# Altium PCB Sampler_DIOT.PCBDOC (part 2 of 10)
Units mm, origin at the board's own origin, x right, y up, seen from the top; angles counter-clockwise.
Board outline 222.9 x 100 mm, 4 copper layers (L1, P2, L3, L4), stack 1.6 mm thick; 697 components, 418 nets, 2175 pads, 1124 vias.
Unrouted connection lines stored in the file: 6.
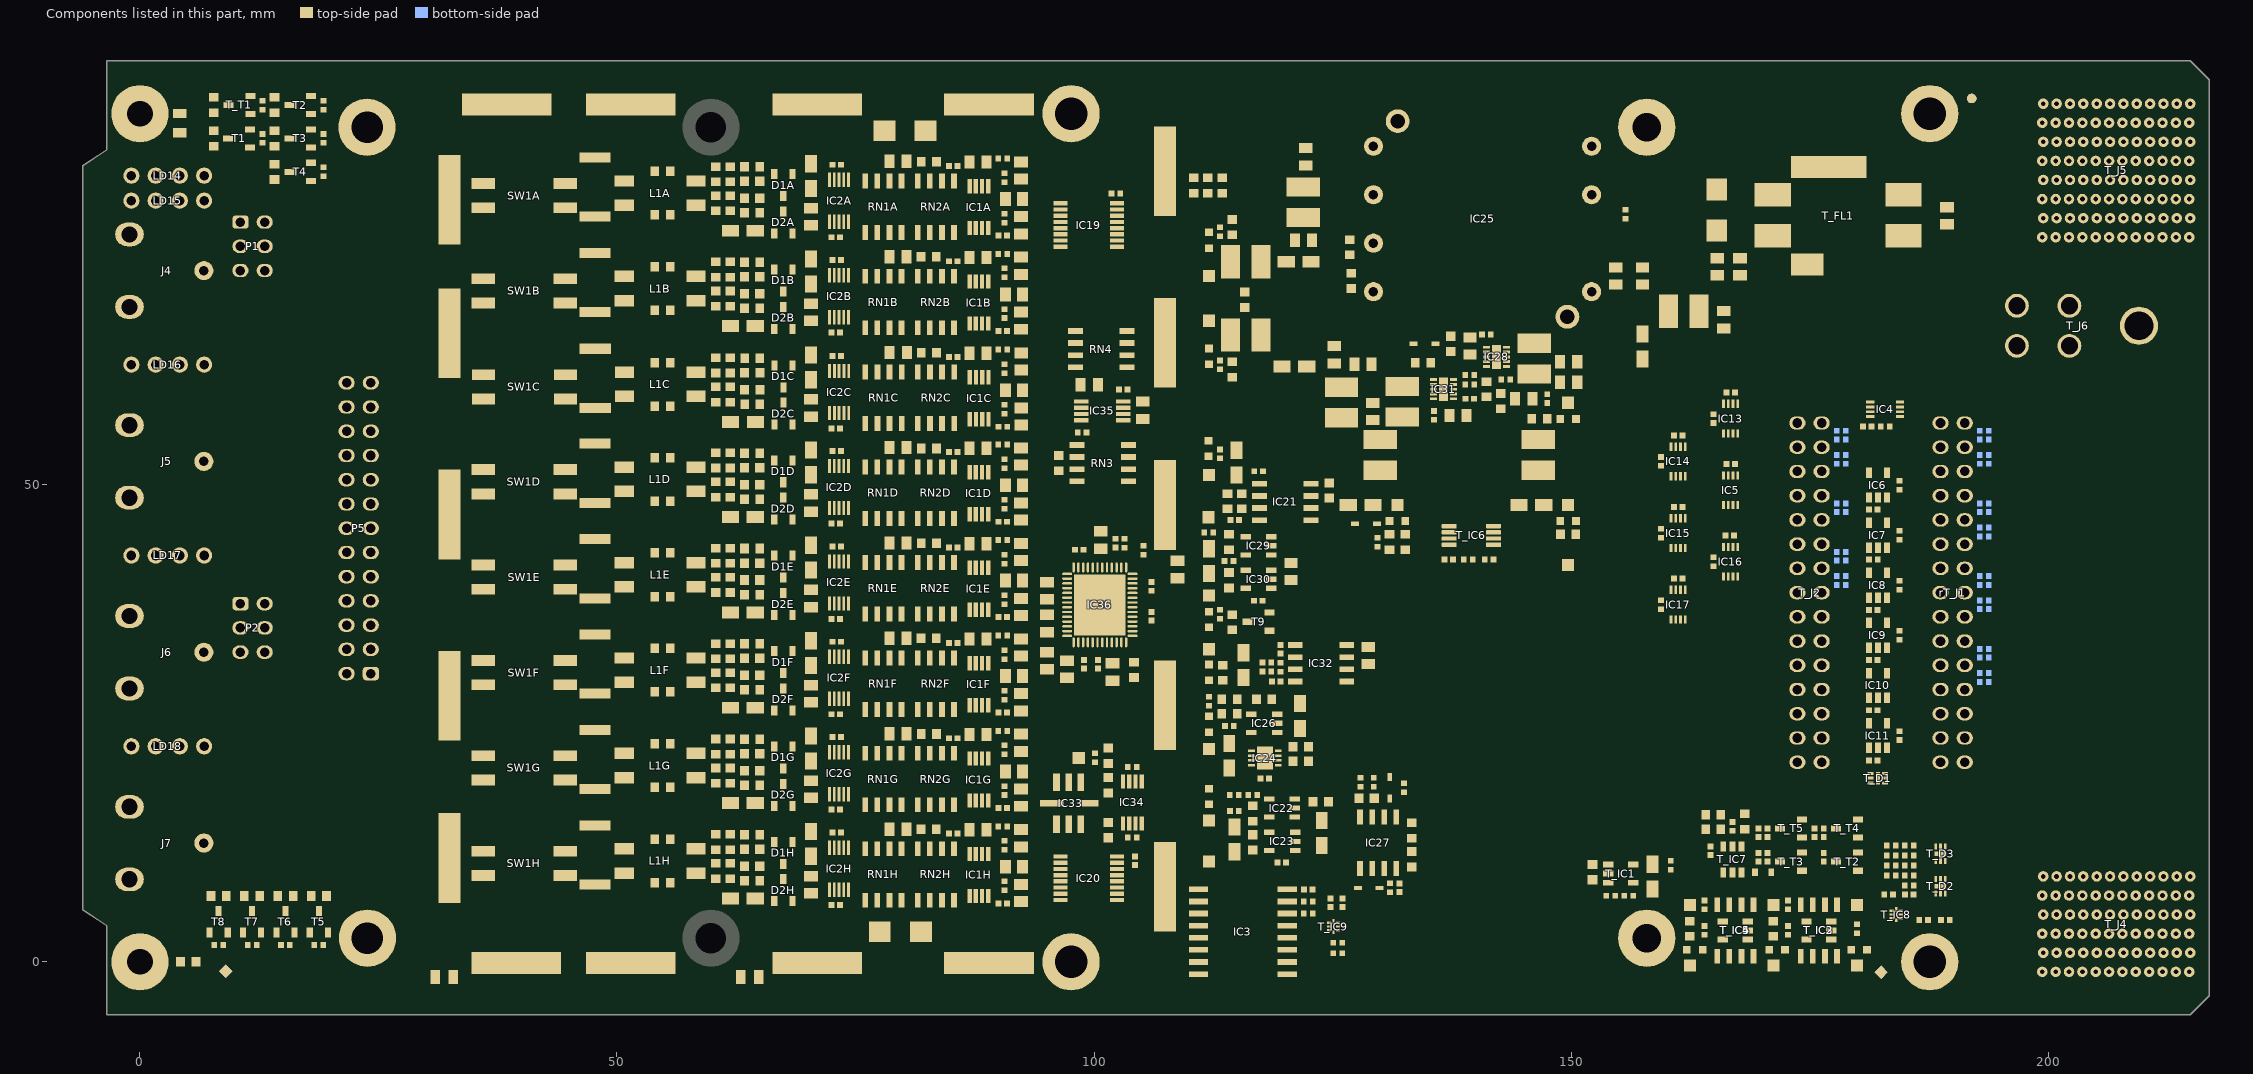
[diagram p4: the components of this part, seen from the top]

## Components (designator, comment, footprint, x,y, rotation, side; value= is the part's Value field where it differs from the comment) (continued)
R5F "49R9" RESC6331X70N 47.694,31.205 r90 top (schematic designator R5)
R5G "49R9" RESC6331X70N 47.694,21.205 r90 top (schematic designator R5)
R5H "49R9" RESC6331X70N 47.694,11.205 r90 top (schematic designator R5)
R6A "51" RESC1005X40N 90.603,77.956 r90 top (schematic designator R6)
R6B "51" RESC1005X40N 90.603,67.956 r90 top (schematic designator R6)
R6C "51" RESC1005X40N 90.616,57.912 r90 top (schematic designator R6)
R6D "51" RESC1005X40N 90.603,47.956 r90 top (schematic designator R6)
R6E "51" RESC1005X40N 90.603,37.956 r90 top (schematic designator R6)
R6F "51" RESC1005X40N 90.603,27.956 r90 top (schematic designator R6)
R6G "51" RESC1005X40N 90.603,17.956 r90 top (schematic designator R6)
R6H "51" RESC1005X40N 90.603,7.956 r90 top (schematic designator R6)
R7A "24k" RESC1608X55N 82.694,83.88 r180 top (schematic designator R7)
R7B "24k" RESC1608X55N 82.669,73.905 r180 top (schematic designator R7)
R7C "24k" RESC1608X55N 82.694,63.855 r180 top (schematic designator R7)
R7D "24k" RESC1608X55N 82.694,53.805 r180 top (schematic designator R7)
R7E "24k" RESC1608X55N 82.694,43.88 r180 top (schematic designator R7)
R7F "24k" RESC1608X55N 82.669,33.905 r180 top (schematic designator R7)
R7G "24k" RESC1608X55N 82.694,23.88 r180 top (schematic designator R7)
R7H "24k" RESC1608X55N 82.669,13.88 r180 top (schematic designator R7)
R8A "Undefined" RESC1608X55N 54.764,78.288 r0 top (schematic designator R8)
R8B "Undefined" RESC1608X55N 54.764,68.288 r0 top (schematic designator R8)
R8C "Undefined" RESC1608X55N 54.777,58.244 r0 top (schematic designator R8)
R8D "Undefined" RESC1608X55N 54.764,48.288 r0 top (schematic designator R8)
R8E "Undefined" RESC1608X55N 54.764,38.288 r0 top (schematic designator R8)
R8F "Undefined" RESC1608X55N 54.764,28.288 r0 top (schematic designator R8)
R8G "Undefined" RESC1608X55N 54.764,18.288 r0 top (schematic designator R8)
R8H "Undefined" RESC1608X55N 54.764,8.288 r0 top (schematic designator R8)
R9A "0" RESC1608X55N 60.352,79.512 r270 top (schematic designator R9)
R9B "0" RESC1608X55N 60.352,69.512 r270 top (schematic designator R9)
R9C "0" RESC1608X55N 60.365,59.468 r270 top (schematic designator R9)
R9D "0" RESC1608X55N 60.352,49.512 r270 top (schematic designator R9)
R9E "0" RESC1608X55N 60.352,39.512 r270 top (schematic designator R9)
R9F "0" RESC1608X55N 60.352,29.512 r270 top (schematic designator R9)
R9G "0" RESC1608X55N 60.352,19.512 r270 top (schematic designator R9)
R9H "0" RESC1608X55N 60.352,9.512 r270 top (schematic designator R9)
R10A "1k8" RESC1608X55N 64.162,78.496 r0 top (schematic designator R10)
R10B "1k8" RESC1608X55N 64.162,68.496 r0 top (schematic designator R10)
R10C "1k8" RESC1608X55N 64.175,58.452 r0 top (schematic designator R10)
R10D "1k8" RESC1608X55N 64.162,48.496 r0 top (schematic designator R10)
R10E "1k8" RESC1608X55N 64.162,38.496 r0 top (schematic designator R10)
R10F "1k8" RESC1608X55N 64.162,28.496 r0 top (schematic designator R10)
R10G "1k8" RESC1608X55N 64.162,18.496 r0 top (schematic designator R10)
R10H "1k8" RESC1608X55N 64.162,8.496 r0 top (schematic designator R10)
R11A "100k" RESC1608X55N 61.876,79.512 r270 top (schematic designator R11)
R11B "100k" RESC1608X55N 61.876,69.512 r270 top (schematic designator R11)
R11C "100k" RESC1608X55N 61.889,59.468 r270 top (schematic designator R11)
R11D "100k" RESC1608X55N 61.876,49.512 r270 top (schematic designator R11)
R11E "100k" RESC1608X55N 61.876,39.512 r270 top (schematic designator R11)
R11F "100k" RESC1608X55N 61.876,29.512 r270 top (schematic designator R11)
R11G "100k" RESC1608X55N 61.876,19.512 r270 top (schematic designator R11)
R11H "100k" RESC1608X55N 61.876,9.512 r270 top (schematic designator R11)
R12A "51" RESC1005X40N 90.603,82.206 r270 top (schematic designator R12)
R12B "51" RESC1005X40N 90.603,72.206 r270 top (schematic designator R12)
R12C "51" RESC1005X40N 90.616,62.162 r270 top (schematic designator R12)
R12D "51" RESC1005X40N 90.603,52.206 r270 top (schematic designator R12)
R12E "51" RESC1005X40N 90.603,42.206 r270 top (schematic designator R12)
R12F "51" RESC1005X40N 90.603,32.206 r270 top (schematic designator R12)
R12G "51" RESC1005X40N 90.603,22.206 r270 top (schematic designator R12)
R12H "51" RESC1005X40N 90.603,12.206 r270 top (schematic designator R12)
R13A "2k4" RESC1005X40N 90.444,84.205 r180 top (schematic designator R13)
R13B "2k4" RESC1005X40N 90.444,74.205 r180 top (schematic designator R13)
R13C "2k4" RESC1005X40N 90.457,64.161 r180 top (schematic designator R13)
R13D "2k4" RESC1005X40N 90.444,54.205 r180 top (schematic designator R13)
R13E "2k4" RESC1005X40N 90.444,44.205 r180 top (schematic designator R13)
R13F "2k4" RESC1005X40N 90.444,34.205 r180 top (schematic designator R13)
R13G "2k4" RESC1005X40N 90.444,24.205 r180 top (schematic designator R13)
R13H "2k4" RESC1005X40N 90.444,14.205 r180 top (schematic designator R13)
R14 "100" RESC1005X40N 182.917,56.114 r180 top
R15 "100" RESC1005X40N 184.427,49.97 r270 top
R16 "100" RESC1005X40N 184.427,44.72 r270 top
R17 "100" RESC1005X40N 184.427,39.47 r270 top
R18 "100" RESC1005X40N 184.427,34.22 r270 top
R19 "100" RESC1005X40N 184.427,23.72 r270 top
R20 "100" RESC1005X40N 164.938,56.948 r90 top
R21 "100" RESC1005X40N 159.427,52.444 r90 top
R22 "100" RESC1005X40N 159.427,44.944 r90 top
R23 "100" RESC1005X40N 164.927,41.945 r90 top
R24 "100" RESC1005X40N 159.427,37.445 r90 top
R25 "10k" RESC1005X40N 12.85,86.301 r270 top
R26 "1k2" RESC1608X55N 7.75,86.301 r90 top
R27 "10k" RESC1005X40N 19.214,89.802 r270 top
R28 "1k2" RESC1608X55N 14.1,89.802 r90 top
R29 "10k" RESC1005X40N 19.214,86.301 r270 top
R30 "1k2" RESC1608X55N 14.1,86.301 r90 top
R31 "10k" RESC1005X40N 19.214,82.8 r270 top
R32 "1k2" RESC1608X55N 14.1,82.8 r90 top
R33 "10k" RESC1005X40N 18.75,1.775 r180 top
R34 "1k2" RESC1608X55N 18.75,6.9 r0 top
R35 "10k" RESC1005X40N 118.13,30.424 r0 top
R36 "10k" RESC1005X40N 15.25,1.775 r180 top
R37 "1k2" RESC1608X55N 15.25,6.9 r0 top
R38 "1k2" RESC1608X55N 11.746,6.9 r0 top
R39 "10k" RESC1005X40N 11.746,1.775 r180 top
R40 "1k2" RESC1608X55N 8.243,6.9 r0 top
R41 "Undefined" RESC1608X55N 110.444,81.38 r270 top
R42 "Undefined" RESC1608X55N 113.444,81.38 r270 top
R43 "10k" RESC1005X40N 8.243,1.775 r180 top
R45 "10k" RESC1005X40N 113.221,76.54 r90 top
R46 "1k2" RESC1608X55N 114.5,77.01 r270 top
R47 "10k" RESC1005X40N 179.977,3.471 r90 top
R48 "10k" RESC1005X40N 113.2,53.23 r270 top
R49 "5k1" RESC1005X40N 114.7,17.5 r0 top
R50 "2k7" RESC1608X55N 132.625,44 r270 top
R51 "24k" RESC1608X55N 113.993,48.269 r270 top
R52 "2k7" RESC1608X55N 115.493,48.269 r90 top
R53 "2k7" RESC1608X55N 117.837,27.5 r0 top
R54 "24k" RESC1608X55N 116.644,15.55 r270 top
R55 "5k1" RESC1005X40N 116.644,17.5 r0 top
R56 "Undefined" RESC1608X55N 126.944,71.38 r270 top
R57 "0" RESC1005X40N 155.694,78.38 r90 top
R58 "36k" RESC1608X55N 126.813,74.899 r270 top
R59 "10k" RESC1005X40N 127.925,18.82 r90 top
R60 "2k4" RESC1005X40N 132.511,18.242 r90 top
R61 "24k" RESC1608X55N 114.2,26.025 r180 top
R62 "62k" RESC1005X40N 129.325,18.82 r270 top
R63 "2k7" RESC1608X55N 114.2,27.5 r0 top
R64 "24k" RESC1608X55N 134.491,62.795 r180 top
R65 "5k1" RESC1005X40N 131.036,7.742 r270 top
R66 "270k" RESC1608X55N 142.641,58.77 r270 top
R67 "24k" RESC1608X55N 133.325,13.767 r90 top
R68 "82k" RESC1608X55N 141.141,60.02 r90 top
R69 "5k1" RESC1005X40N 143.141,61.02 r180 top
R70 "36k" RESC1608X55N 114.15,44 r270 top
R71 "33k" RESC1005X40N 112.05,45 r0 top
R72 "33k" RESC1005X40N 139.391,60.52 r0 top
R73 "62k" RESC1005X40N 118.13,31.364 r180 top
R74 "5k1" RESC1005X40N 139.391,61.52 r180 top
R75 "10k" RESC1005X40N 119.546,30.894 r90 top
R76 "1k" RESC1608X55N 114.5,35.6 r270 top
R77 "82k" RESC1608X55N 104.194,30.605 r90 top
R78 "0" RESC1005X40N 103.187,43.891 r90 top
R79 "100" RESC1005X40N 105.194,43.13 r270 top
R80 "0" RESC1005X40N 104.021,13.013 r180 top
R81 "0" RESC1005X40N 100.1,21.4 r90 top
R82 "0" RESC1005X40N 104.021,20.409 r180 top
R83 "24k" RESC1608X55N 96.3,52.275 r270 top
R84 "1k2" RESC1608X55N 130.975,44 r90 top
R85 "2k7" RESC1608X55N 113.5,30.3 r90 top
R86 "Undefined" RESC1608X55N 111.944,81.38 r270 top
R87 "1k2" RESC1608X55N 146.7,56.9 r180 top
R88 "1k2" RESC1608X55N 149.7,44.8 r180 top
R89 "1k2" RESC1608X55N 171.221,3.471 r90 top
R90 "1k2" RESC1608X55N 162.465,3.471 r90 top
R91 "470" RESC1005X40N 113.2,36.42 r270 top
R92 "10k" RESC1005X40N 112.05,27.3 r90 top
R93 "10k" RESC1005X40N 113.221,62.56 r270 top
R94 "1k2" RESC1608X55N 114.5,62.09 r90 top
R157 "0" RESC1005X40N 129.7,43.97 r270 top
RN1A "10k 5K 5K 10K" SOIC127P600X175-8N 77.923,79.157 r90 top (schematic designator RN1)
RN1B "10k 5K 5K 10K" SOIC127P600X175-8N 77.923,69.157 r90 top (schematic designator RN1)
RN1C "10k 5K 5K 10K" SOIC127P600X175-8N 77.936,59.113 r90 top (schematic designator RN1)
RN1D "10k 5K 5K 10K" SOIC127P600X175-8N 77.923,49.157 r90 top (schematic designator RN1)
RN1E "10k 5K 5K 10K" SOIC127P600X175-8N 77.923,39.157 r90 top (schematic designator RN1)
RN1F "10k 5K 5K 10K" SOIC127P600X175-8N 77.923,29.157 r90 top (schematic designator RN1)
RN1G "10k 5K 5K 10K" SOIC127P600X175-8N 77.923,19.157 r90 top (schematic designator RN1)
RN1H "10k 5K 5K 10K" SOIC127P600X175-8N 77.923,9.157 r90 top (schematic designator RN1)
RN2A "10k 5K 5K 10K" SOIC127P600X175-8N 83.429,79.155 r270 top (schematic designator RN2)
RN2B "10k 5K 5K 10K" SOIC127P600X175-8N 83.429,69.155 r270 top (schematic designator RN2)
RN2C "10k 5K 5K 10K" SOIC127P600X175-8N 83.442,59.112 r270 top (schematic designator RN2)
RN2D "10k 5K 5K 10K" SOIC127P600X175-8N 83.429,49.155 r270 top (schematic designator RN2)
RN2E "10k 5K 5K 10K" SOIC127P600X175-8N 83.429,39.155 r270 top (schematic designator RN2)
RN2F "10k 5K 5K 10K" SOIC127P600X175-8N 83.429,29.155 r270 top (schematic designator RN2)
RN2G "10k 5K 5K 10K" SOIC127P600X175-8N 83.429,19.155 r270 top (schematic designator RN2)
RN2H "10k 5K 5K 10K" SOIC127P600X175-8N 83.429,9.155 r270 top (schematic designator RN2)
RN3 "10k 5K 5K 10K" SOIC127P600X175-8N 100.925,52.275 r0 top
RN4 "10k 5K 5K 10K" SOIC127P600X175-8N 100.75,64.225 r0 top
rT_J1 "" 3M_N2530-6002RB 190,38.7 r270 top locked (schematic designator T_J1)
SCREW1 "M3x8" BOSSARD_BN5687-3061606_v 23.8,87.48 r0 top
SCREW2 "M3x8" BOSSARD_BN5687-3061606_v 23.844,2.48 r0 top
Standoff1 "M3x11" SAMTEC_SO-1115-03-N 23.844,2.48 r0 top
Standoff2 "M3x11" SAMTEC_SO-1115-03-N 23.8,87.48 r0 top
SW1A "Switch" SW_CTS_204-121ST 40.286,80.32 r0 top (schematic designator SW1)
SW1B "Switch" SW_CTS_204-121ST 40.286,70.32 r0 top (schematic designator SW1)
SW1C "Switch" SW_CTS_204-121ST 40.299,60.276 r0 top (schematic designator SW1)
SW1D "Switch" SW_CTS_204-121ST 40.286,50.32 r0 top (schematic designator SW1)
SW1E "Switch" SW_CTS_204-121ST 40.286,40.32 r0 top (schematic designator SW1)
SW1F "Switch" SW_CTS_204-121ST 40.286,30.32 r0 top (schematic designator SW1)
SW1G "Switch" SW_CTS_204-121ST 40.286,20.32 r0 top (schematic designator SW1)
SW1H "Switch" SW_CTS_204-121ST 40.286,10.32 r0 top (schematic designator SW1)
T1 "BSS138LT1G" SOT95P240X110-3N 10.4,86.301 r180 top
T2 "BSS138LT1G" SOT95P240X110-3N 16.8,89.802 r180 top
T3 "BSS138LT1G" SOT95P240X110-3N 16.8,86.301 r180 top
T4 "BSS138LT1G" SOT95P240X110-3N 16.8,82.8 r180 top
T5 "BSS138LT1G" SOT95P240X110-3N 18.75,4.2 r90 top
T6 "BSS138LT1G" SOT95P240X110-3N 15.25,4.2 r90 top
T7 "BSS138LT1G" SOT95P240X110-3N 11.746,4.2 r90 top
T8 "BSS138LT1G" SOT95P240X110-3N 8.243,4.2 r90 top
T9 "BSS138LT1G" SOT95P240X110-3N 117.25,35.65 r180 top
T_B7 "Plated Hole" c600h270 0,0 r0 top
T_B8 "Plated Hole" c600h270 0,88.9 r0 top locked
T_C1 "1uF" CAPC1608X87N 152.25,9.4 r90 top
T_C2 "4.7uF" CAPMP3216X180N 158.55,8.925 r270 top
T_C3 "100nF" CAPC1005X55N 172.753,3.284 r90 top
T_C4 "100nF" CAPC1005X55N 172.753,5.963 r270 top
T_C5 "100nF" CAPC1005X55N 163.997,3.284 r90 top
T_C6 "100nF" CAPC1005X55N 163.997,5.963 r270 top
T_C8 "100nF" CAPC1005X55N 137.188,42.184 r180 top
T_C9 "10uF" CAPC2012X95N 167.73,72.85 r90 top
T_C10 "10uF" CAPC2012X95N 165.33,72.85 r90 top
T_C11 "10uF" CAPC2012X95N 189.4,78.2 r270 top
T_C12 "18pF" CAPC1608X87N 5.05,0 r180 top
T_C13 "10nF" CAPC1005X55N 166.919,14.186 r90 top
T_C14 "100nF" CAPC1005X55N 175.542,13.527 r270 top
T_C15 "100nF" CAPC1005X55N 170.609,13.527 r270 top
T_C16 "10nF" CAPC1005X55N 169.658,13.527 r270 top
T_C17 "10nF" CAPC1005X55N 176.493,10.95 r90 top
T_C18 "10nF" CAPC1005X55N 169.658,10.95 r90 top
T_C19 "10nF" CAPC1005X55N 170.609,10.95 r90 top
T_C20 "100nF" CAPC1005X55N 164.62,11.636 r90 top
T_C21 "100nF" CAPC1005X55N 176.493,13.527 r90 top
T_C22 "100nF" CAPC1005X55N 183.28,7.042 r0 top
T_C23 "100nF" CAPC1005X55N 185.45,7.042 r180 top
T_C24 "100nF" CAPC1005X55N 126.05,6.196 r270 top
T_C25 "100nF" CAPC1005X55N 124.8,6.196 r270 top
T_D1 "UCLAMP3305P.TCT" SON50P160X65_HS-7N 182.177,19.25 r180 top
T_D2 "UCLAMP3305P.TCT" SON50P160X65_HS-7N 188.731,7.933 r90 top
T_D3 "UCLAMP3305P.TCT" SON50P160X65_HS-7N 188.731,11.332 r90 top
T_D5 "SMBJ12A" DIOM5336X265N 165.3,78.8 r90 top
T_D6 "CDBU0520-HF" SOD-523F 170.126,9.391 r180 top
T_FL1 "10A/50VDC" FIL_MURATA_BNX02 178,78.2 r180 top
T_IC1 "MIC5219-3.3YM5" SOT95P280X145-5N 155.225,9.25 r0 top
T_IC2 "24AA02E48T-I/OT" SOT95P280X145-5N 175.983,3.284 r180 top
T_IC3 "24AA025E48-I/SN" SOIC127P600X175-8N 175.983,3.284 r90 top
T_IC4 "24AA02E48T-I/OT" SOT95P280X145-5N 167.228,3.284 r180 top
T_IC5 "24AA025E48-I/SN" SOIC127P600X175-8N 167.228,3.284 r90 top
T_IC6 "LM75AIMMX/NOPB" DGK0008A_M 139.55,44.692 r180 top
T_IC7 "TPS3808G01DBVT" SOT95P280X145-6N 166.919,10.736 r90 top
T_IC8 "FXMA2102UMX" FXMA2102UMX 184.091,4.958 r270 top
T_IC9 "FXMA2102UMX" FXMA2102UMX 125.1,3.7 r270 top
T_J2 "" 3M_N2530-6002RB 175,38.7 r270 top locked
T_J4 "P1" AMPHENOL_10052825-101LF 207.15,3.95 r90 top locked
T_J5 "P6" AMPHENOL_10052838-101LF 207.15,82.95 r90 top locked
T_J6 "Mini-Fit Jr.™" MOLEX_39-30-0040 199.485,66.667 r270 top locked
T_M1 "PTH_3.4X6_BTKO" PTH-M3.4x6.0_BTKO 97.6,88.9 r180 top locked
T_M2 "PTH_3.4X6_BTKO" PTH-M3.4x6.0_BTKO 187.6,88.9 r180 top
T_M3 "PTH_3.4X6_BTKO" PTH-M3.4x6.0_BTKO 97.6,0 r0 top locked
T_M4 "PTH_3.4X6_BTKO" PTH-M3.4x6.0_BTKO 187.6,0 r0 top locked
T_R1 "1k8" RESC1608X55N 7.75,89.802 r90 top
T_R2 "0" RESC1005X40N 160.45,10.125 r270 top
T_R3 "10k" RESC1005X40N 12.85,89.802 r270 top
T_R4 "0" RESC1005X40N 156.05,6.925 r180 top
T_R5 "10k" RESC1005X40N 125.55,0.9 r0 top
T_R6 "10k" RESC1005X40N 125.55,2 r0 top
T_R7 "10k" RESC1005X40N 154.15,6.925 r0 top
T_R8 "10k" RESC1005X40N 141.405,42.184 r180 top
T_R9 "1k2" RESC1608X55N 164.907,15.4 r180 top
T_R13 "22" RESC1005X40N 185.472,9.044 r0 top
T_R14 "22" RESC1005X40N 185.472,10.098 r0 top
T_R15 "22" RESC1005X40N 185.472,7.99 r0 top
T_R16 "22" RESC1005X40N 185.472,11.153 r0 top
T_R17 "22" RESC1005X40N 189.25,4.4 r0 top
T_R18 "22" RESC1005X40N 185.472,12.207 r0 top
T_R19 "200" RESC1005X40N 186.95,4.4 r180 top
T_R25 "0" RESC1005X40N 139.22,42.184 r180 top
T_R26 "1M1" RESC2012X60N 4.152,87.9 r270 top
T_R27 "10M" RESC2113X55N 63.914,-1.604 r0 top
T_R28 "10M" RESC2113X55N 31.899,-1.604 r180 top
T_R29 "100k" RESC1608X55N 168.2,14.7 r90 top
T_R30 "2k7" RESC1608X55N 164.907,13.9 r0 top
T_R31 "10k" RESC1005X40N 183.562,9.034 r180 top
T_R32 "10k" RESC1005X40N 183.562,10.078 r180 top
T_R33 "10k" RESC1005X40N 183.562,11.153 r180 top
T_R34 "10k" RESC1005X40N 183.562,12.207 r180 top
T_R35 "0" RESC1005X40N 193.326,55.668 r180 bottom
T_R36 "0" RESC1005X40N 193.326,53.128 r180 bottom
T_R37 "0" RESC1005X40N 193.326,48.048 r180 bottom
T_R38 "0" RESC1005X40N 193.326,45.508 r180 bottom
T_R39 "0" RESC1005X40N 193.326,40.428 r180 bottom
T_R40 "0" RESC1005X40N 193.326,37.888 r180 bottom
T_R41 "0" RESC1005X40N 193.326,32.808 r180 bottom
T_R42 "0" RESC1005X40N 193.326,30.268 r180 bottom
T_R43 "0" RESC1005X40N 178.326,55.668 r180 bottom
T_R44 "0" RESC1005X40N 178.326,53.128 r180 bottom
T_R45 "0" RESC1005X40N 178.326,48.048 r180 bottom
T_R46 "0" RESC1005X40N 178.326,42.071 r180 bottom
T_R47 "0" RESC1005X40N 178.326,40.428 r180 bottom
T_R51 "0" RESC1005X40N 193.326,54.749 r180 bottom
T_R52 "0" RESC1005X40N 193.326,52.209 r180 bottom
T_R53 "0" RESC1005X40N 193.326,47.129 r180 bottom
T_R54 "0" RESC1005X40N 193.326,44.589 r180 bottom
T_R55 "0" RESC1005X40N 193.326,39.509 r180 bottom
T_R56 "0" RESC1005X40N 193.326,36.969 r180 bottom
T_R57 "0" RESC1005X40N 193.326,31.889 r180 bottom
T_R58 "0" RESC1005X40N 193.326,29.349 r180 bottom
T_R59 "0" RESC1005X40N 178.326,54.749 r180 bottom
T_R60 "0" RESC1005X40N 178.326,52.209 r180 bottom
T_R61 "0" RESC1005X40N 178.326,47.129 r180 bottom
T_R62 "0" RESC1005X40N 178.326,42.971 r180 bottom
T_R63 "0" RESC1005X40N 178.326,39.509 r180 bottom
T_R67 "10k" RESC1005X40N 122.45,6.331 r0 top
T_R68 "10k" RESC1005X40N 122.45,5.061 r0 top
T_T1 "BSS138LT1G" SOT95P240X110-3N 10.425,89.815 r180 top
T_T2 "BSS138LT1G" SOT95P240X110-3N 178.95,10.5 r180 top
T_T3 "BSS138LT1G" SOT95P240X110-3N 173.066,10.5 r180 top
T_T4 "BSS138LT1G" SOT95P240X110-3N 178.95,13.977 r180 top
T_T5 "BSS138LT1G" SOT95P240X110-3N 173.066,13.977 r180 top
TP1 "Test Point" TPS127 112.05,71.9 r270 top
TP2 "Test Point" TPS127 179.977,5.949 r90 top
TP3 "Test Point" TPS127 149.7,41.6 r90 top
TP4 "Test Point" TPS127 171.221,-0.387 r90 top
TP5 "Test Point" TPS127 179.977,-0.387 r90 top
TP6 "Test Point" TPS127 162.465,-0.387 r90 top
TP7 "Test Point" TPS127 112.05,51.025 r0 top
TP8 "Test Point" TPS127 112.05,14.798 r0 top
TP9 "Test Point" TPS127 112.05,22.29 r180 top
TP10 "Test Point" TPS127 112.05,38.406 r180 top
TP11 "Test Point" TPS127 149.7,47.88 r90 top
TP12 "Test Point" TPS127 131.8,47.88 r90 top
TP13 "Test Point" TPS127 112.05,32.763 r0 top
TP14 "Test Point" TPS127 112.05,10.5 r90 top
TP15 "Test Point" TPS127 98.4,21.35 r90 top
TP16 "Test Point" TPS127 112,46.6 r90 top
TP17 "Test Point" TPS127 149.7,58.597 r180 top
TP18 "Test Point" TPS127 171.221,5.949 r90 top
TP19 "Test Point" TPS127 162.465,5.949 r90 top
TP20 "Test Point" TPS127 112.05,67.2 r90 top
WASHER1 "D8xd3.2" BOSSARD_BN678-1250191_v 23.844,2.48 r180 bottom
WASHER2 "D8xd3.2" BOSSARD_BN678-1250191_v 23.844,2.48 r0 top
WASHER3 "D8xd3.2" BOSSARD_BN678-1250191_v 23.8,87.48 r180 bottom
WASHER4 "D8xd3.2" BOSSARD_BN678-1250191_v 23.8,87.48 r0 top

## Footprints (in the part's own frame and the unit in brackets; to place one, negate y for a bottom-side part, rotate by r counter-clockwise, add the part's x,y. Pads: shape width x height; smd on the part's side, far side on the other; paste and mask are expansions set on the pad)
3M_N2530-6002RB [mm] "30 Contacts - Straight .100\" x .100\" Low Profile Four-Wall Header"
  oval 1.4x1.7 hole 1: 1(-17.78,-1.27) 2(-17.78,1.27) 3(-15.24,-1.27) 4(-15.24,1.27) 5(-12.7,-1.27) 6(-12.7,1.27) 7(-10.16,-1.27) 8(-10.16,1.27) 9(-7.62,-1.27) 10(-7.62,1.27) 11(-5.08,-1.27) 12(-5.08,1.27) 13(-2.54,-1.27) 14(-2.54,1.27) 15(0,-1.27) 16(0,1.27) 17(2.54,-1.27) 18(2.54,1.27) 19(5.08,-1.27) 20(5.08,1.27) 21(7.62,-1.27) 22(7.62,1.27) 23(10.16,-1.27) 24(10.16,1.27) 25(12.7,-1.27) 26(12.7,1.27) 27(15.24,-1.27) 28(15.24,1.27) 29(17.78,-1.27) 30(17.78,1.27)
  silkscreen extent -22.71,-4.85 22.71,4.52, body extent -22.71,-4.11 22.71,4.52, height 9.91
61300621121 [mm]
  rrect50% 1.4x1.7 hole 1: 1(-2.54,-1.27)
  oval 1.4x1.7 hole 1: 2(-2.54,1.27) 3(0,-1.27) 4(0,1.27) 5(2.54,-1.27) 6(2.54,1.27)
  silkscreen extent -4.54,-2.62 3.96,2.62, body extent -3.81,-2.54 3.81,2.54, height 8.59
61302621121 [mm]
  rrect50% 1.4x1.7 hole 1: 1(-15.24,-1.27)
  oval 1.4x1.7 hole 1: 2(-15.24,1.27) 3(-12.7,-1.27) 4(-12.7,1.27) 5(-10.16,-1.27) 6(-10.16,1.27) 7(-7.62,-1.27) 8(-7.62,1.27) 9(-5.08,-1.27) 10(-5.08,1.27) 11(-2.54,-1.27) 12(-2.54,1.27) 13(0,-1.27) 14(0,1.27) 15(2.54,-1.27) 16(2.54,1.27) 17(5.08,-1.27) 18(5.08,1.27) 19(7.62,-1.27) 20(7.62,1.27) 21(10.16,-1.27) 22(10.16,1.27) 23(12.7,-1.27) 24(12.7,1.27) 25(15.24,-1.27) 26(15.24,1.27)
  silkscreen extent -17.24,-2.62 16.66,2.62, body extent -16.51,-2.54 16.51,2.54, height 8.59
AMPHENOL_10052825-101LF [mm] "72 Contacts, 2mm Pitch, 6 Columns, 4 Pairs per Column, 4 Walls, Right Angle Header"
  round 1.1 hole 0.5: A1(-5,-7.65) A2(-3,-7.75) A3(-1,-7.65) A4(1,-7.75) A5(3,-7.65) A6(5,-7.75) B1(-5,-6.25) B2(-3,-6.35) B3(-1,-6.25) B4(1,-6.35) B5(3,-6.25) B6(5,-6.35) C1(-5,-4.85) C2(-3,-4.95) C3(-1,-4.85) C4(1,-4.95) C5(3,-4.85) C6(5,-4.95) D1(-5,-3.45) D2(-3,-3.55) D3(-1,-3.45) D4(1,-3.55) D5(3,-3.45) D6(5,-3.55) E1(-5,-2.05) E2(-3,-2.15) E3(-1,-2.05) E4(1,-2.15) E5(3,-2.05) E6(5,-2.15) F1(-5,-0.65) F2(-3,-0.75) F3(-1,-0.65) F4(1,-0.75) F5(3,-0.65) F6(5,-0.75) G1(-5,0.75) G2(-3,0.65) G3(-1,0.75) G4(1,0.65) G5(3,0.75) G6(5,0.65) H1(-5,2.15) H2(-3,2.05) H3(-1,2.15) H4(1,2.05) H5(3,2.15) H6(5,2.05) I1(-5,3.55) I2(-3,3.45) I3(-1,3.55) I4(1,3.45) I5(3,3.55) I6(5,3.45) J1(-5,4.95) J2(-3,4.85) J3(-1,4.95) J4(1,4.85) J5(3,4.95) J6(5,4.85) K1(-5,6.35) K2(-3,6.25) K3(-1,6.35) K4(1,6.25) K5(3,6.35) K6(5,6.25) L1(-5,7.75) L2(-3,7.65) L3(-1,7.75) L4(1,7.65) L5(3,7.75) L6(5,7.65)
  silkscreen extent -6.95,-9.4 6.95,11.85, body extent -6.95,-21.95 6.95,11.85, height 15.25
AMPHENOL_10052838-101LF [mm] "96 Contacts, 2mm Pitch, 8 Columns, 4 Pairs per Column, 4 Walls, Right Angle Header"
  round 1.1 hole 0.5: A1(-7,-7.65) A2(-5,-7.75) A3(-3,-7.65) A4(-1,-7.75) A5(1,-7.65) A6(3,-7.75) A7(5,-7.65) A8(7,-7.75) B1(-7,-6.25) B2(-5,-6.35) B3(-3,-6.25) B4(-1,-6.35) B5(1,-6.25) B6(3,-6.35) B7(5,-6.25) B8(7,-6.35) C1(-7,-4.85) C2(-5,-4.95) C3(-3,-4.85) C4(-1,-4.95) C5(1,-4.85) C6(3,-4.95) C7(5,-4.85) C8(7,-4.95) D1(-7,-3.45) D2(-5,-3.55) D3(-3,-3.45) D4(-1,-3.55) D5(1,-3.45) D6(3,-3.55) D7(5,-3.45) D8(7,-3.55) E1(-7,-2.05) E2(-5,-2.15) E3(-3,-2.05) E4(-1,-2.15) E5(1,-2.05) E6(3,-2.15) E7(5,-2.05) E8(7,-2.15) F1(-7,-0.65) F2(-5,-0.75) F3(-3,-0.65) F4(-1,-0.75) F5(1,-0.65) F6(3,-0.75) F7(5,-0.65) F8(7,-0.75) G1(-7,0.75) G2(-5,0.65) G3(-3,0.75) G4(-1,0.65) G5(1,0.75) G6(3,0.65) G7(5,0.75) G8(7,0.65) H1(-7,2.15) H2(-5,2.05) H3(-3,2.15) H4(-1,2.05) H5(1,2.15) H6(3,2.05) H7(5,2.15) H8(7,2.05) I1(-7,3.55) I2(-5,3.45) I3(-3,3.55) I4(-1,3.45) I5(1,3.55) I6(3,3.45) I7(5,3.55) I8(7,3.45) J1(-7,4.95) J2(-5,4.85) J3(-3,4.95) J4(-1,4.85) J5(1,4.95) J6(3,4.85) J7(5,4.95) J8(7,4.85) K1(-7,6.35) K2(-5,6.25) K3(-3,6.35) K4(-1,6.25) K5(1,6.35) K6(3,6.25) K7(5,6.35) K8(7,6.25) L1(-7,7.75) L2(-5,7.65) L3(-3,7.75) L4(-1,7.65) L5(1,7.75) L6(3,7.65) L7(5,7.75) L8(7,7.65)
  silkscreen extent -8.95,-9.4 8.95,11.85, body extent -8.95,-21.95 8.95,11.85, height 15.25
BOSSARD_BN81-1400401_v [mm] "M3 Hexagon Nut ~0,8d, DIN 555, Polyamide PA 6.6"
  body extent -3.18,-2.75 3.18,2.75, height 3
BOSSARD_BN678-1250191_v [mm] "Waved Spring Washer for M3 Screw - Stainless Steel - A2 / 1.4310"
  body extent -4,-4 4,4, height 0.5
BOSSARD_BN5687-3061606_v [mm] "M3 L=8mm Hexalobular Socket Pan Head Screw, Fully Threaded - Stainless Steel A2"
  body extent -2.8,-2.8 2.8,2.8, height 15.1
c600h270 [mm] "Plated Through Hole: Hole Dia.=2.7mm Pad Dia.=6.0mm"
  round 6 hole 2.7: 1(0,0)
CAPC1005X55N [mm] "Capacitor, Non-Polarized, Chip; 1.00mm L X 0.50mm W X 0.70mm H, IPC Medium Density"
  rect 0.62x0.62 smd: 1(-0.45,0) 2(0.45,0)
  body extent -0.52,-0.27 0.53,0.28, height 0.55
CAPC1608X87N [mm] "Chip Capacitor, Body 1.6x0.8mm IPC Medium Density"
  rect 0.95x1 smd: 1(-0.8,0) 2(0.8,0)
  body extent -0.87,-0.47 0.88,0.48, height 0.87
CAPC2012X90N [mm] "Chip Capacitor, Body 2.0x1.25mm, IPC Medium Density"
  rect 1.1x1.45 smd: 1(-0.9,0) 2(0.9,0)
  silkscreen extent 0,-0.58 0,0.58, body extent -1.05,-0.67 1.05,0.68, height 0.9
CAPC2012X95N [mm] "Chip Capacitor, Body 2.0x1.25mm, IPC Medium Density"
  rect 1.1x1.45 smd: 1(-0.9,0) 2(0.9,0)
  silkscreen extent 0,-0.58 0,0.58, body extent -1.05,-0.67 1.05,0.68, height 0.95
CAPC2012X135N [mm] "Chip Capacitor, Body 2.0x1.25mm, IPC Medium Density"
  rect 1.05x1.4 smd: 1(-0.9,0) 2(0.9,0)
  silkscreen extent 0,-0.58 0,0.58, body extent -1.05,-0.67 1.05,0.68, height 1.25
CAPC2013X100N [mm] "Capacitor, Non-Polarized, Chip; 2.00mm L X 1.25mm W X 0.9mm H, IPC Medium Density"
  rect 1.15x1.45 smd: 1(-0.9,0) 2(0.9,0)
  silkscreen extent 0,-0.63 0,0.63, body extent -1.1,-0.72 1.1,0.73, height 1
CAPMP3216X180N [mm] "Capacitor, Polarized, Molded  Body 3.2x1.6mm, IPC Medium Density"
  rect 1.8x1.25 smd: 1(-1.3,0) 2(1.3,0)
  silkscreen extent -2.4,-0.7 0,1.25, body extent -1.7,-0.9 1.7,0.9, height 1.6
CC6-1212DF-E [mm]
  round 2 hole 1: 1(-2.54,-2.63) 2(-2.54,-12.79) 3(-2.54,-17.87) 4(20.32,-17.87) 5(20.32,-12.79) 6(20.32,-7.71) 7(20.32,-2.63)
  round 2.5 hole 1.5: 8(0,0) 9(17.78,-20.5)
  silkscreen extent -4.06,-20.83 20.44,0.25, body extent -2.72,-20.81 20.44,0.29, height 8.4
CLIP_HOLLAND-SHIELDING_LC [mm]
  rect 9.4x2.3 smd: 1(0,0)
  silkscreen extent -4.7,-1.5 4.7,1.5, body extent -4.4,-1.15 4.4,1.15, height 3.5
DGK0008A_M [mm] "TSOP, 8-Leads, Body 3.1x3.1mm, Pitch 0.65mm, IPC Low Density"
  rrect22% 1.55x0.45 smd: 1(-2.325,0.975) 2(-2.325,0.325) 3(-2.325,-0.325) 4(-2.325,-0.975) 5(2.325,-0.975) 6(2.325,-0.325) 7(2.325,0.325) 8(2.325,0.975)
  silkscreen extent -2.45,-1.55 1.15,1.92, body extent -2.45,-1.5 2.45,1.5, height 0.94
DIOM5336X265N [mm] "DO-214-AA/SMB Diode, Molded Body; 5.34mm L X 3.625mm W X 2.65mm H, IPC Medium Density"
  rect 2.3x2.15 smd: 1(-2.15,0) 2(2.15,0)
  silkscreen extent -3.92,-1.8 2.65,1.8, body extent -2.7,-1.95 2.7,1.95, height 2.4
FIDUCIAL_TOP_C100-200 [mm] "Round Fiducial Target, Top Layer, 1.0mm, Top Solder 2.0mm, Keepout =2.0mm"
  round 1 smd paste-0.51 mask+0.5: FTG2(0,0)
  L1 keep-out circle w0.1: c0,0 r1
FIDUCIAL_TOP_S100-200 [mm] "Square Fiducial Target, Top Layer, 1.0mm, Top Solder 2.0mm, Keepout =2.0mm"
  rect 1x1 smd rot 45 paste-0.51 mask+0.5: 1(0,0)
  L1 keep-out region: 1.414,0 0,-1.414 -1.414,0 0,1.414
FIL_MURATA_BNX02 [mm] "Block Type EMIFIL LC Combined Type, BNX02* Series"
  rect 3.8x2.5 smd: 1(-6.85,2.1) 2(6.85,2.1) 3(-6.85,-2.2) 4(6.85,-2.2)
  rect 7.9x2.3 smd: 4(1,-5.1)
  rect 3.4x2.3 smd: 4(3.25,5.1)
  silkscreen extent -5.95,-4.45 7.77,5.05, body extent -6.05,-4.55 6.05,4.55, height 3.1
FXMA2102UMX [mm]
  rect 0.55x0.25 smd: 1(-0.53,0)
  rect 0.25x0.45 smd: 2(-0.4,-0.475) 3(0,-0.475) 4(0.4,-0.475) 6(0.4,0.475) 7(0,0.475) 8(-0.4,0.475)
  rect 0.45x0.25 smd: 5(0.58,0)
  silkscreen extent -1.1,-0.05 -1,0.05, body extent -0.71,-0.61 0.71,0.61, height 0.5
IND_MURATA-PS_8400 [mm] "Miniature Surface Mount Power Inductors, 4.5mm L X 3.3mm W X 2.9mm H, MURATA 8400 Series"
  rect 2x3.5 smd: 1(-1.6,0) 2(1.6,0)
  silkscreen extent -0.3,-1.8 0.3,1.8, body extent -2.4,-1.8 2.4,1.8, height 2.9
IND_WURTH_WE-SL2 [mm] "Common Mode SMD Line Filter WE-SL2"
  rect 2x1.2 smd: 1(-3.75,1.27) 2(-3.75,-1.27) 3(3.75,-1.27) 4(3.75,1.27)
  silkscreen extent -4.75,-3.15 4.75,3.15, body extent -4.75,-3.15 4.75,3.15, height 5.3
LCCS127P500X500X145-8N [mm]
  rect 1.85x0.7 smd: 1(-2.2,1.27) 2(-2.2,0) 3(-2.2,-1.27) 5(2.2,-1.27) 6(2.2,0) 7(2.2,1.27)
  rect 0.7x1.85 smd: 4(0,-2.2)
  rect 0.7x2.5 smd: 8(0,1.75)
  silkscreen extent -3.8,-2.6 2.6,2.6, body extent -2.63,-2.63 2.63,2.63, height 1.55
LED_DIALIGHT_571-0112F [mm] "2x 2mm LED (Top: Red, Bot: Green) PCB Edge Mounting (Without positioning pins) DIALIGHT 571 Serie"
  round 1.7 hole 1: 1(0,0) 2(2.54,0) 3(5.08,0) 4(7.62,0)
  silkscreen extent -6.55,-1.24 8.89,1.24, body extent -6.55,-1.24 8.89,1.24, height 8.61
LED_DIALIGHT_571-0122F [mm] "2x 2mm LED (Top: Green, Bot: Green) PCB Edge Mounting (Without positioning pins) DIALIGHT 571 Serie"
  round 1.7 hole 1: 1(0,0) 2(2.54,0) 3(5.08,0) 4(7.62,0)
  silkscreen extent -6.55,-1.24 8.89,1.24, body extent -6.55,-1.24 8.89,1.24, height 8.61
LED_KINGBRIGHT_KPH-1608CGCK [mm] "SMT Green LED, Case 0603, Body L 1.6 x W 0.8mm H 0.65mm"
  rect 0.8x0.8 smd: 1(-0.825,0) 2(0.825,0)
  silkscreen extent -1.82,-0.4 0.08,0.4, body extent -0.8,-0.4 0.8,0.4, height 0.65
LT-DD-8_V [mm] "SON, 8-Leads, Body 3x3mm, Pitch 0.5mm, Thermal Pad 1.65x2.38 mm, IPC Low Density"
  rect 0.7x0.25 smd mask+0.15: 1(-1.4,0.75) 2(-1.4,0.25) 3(-1.4,-0.25) 4(-1.4,-0.75) 5(1.4,-0.75) 6(1.4,-0.25) 7(1.4,0.25) 8(1.4,0.75)
  rect 1.65x2.38 smd mask+0.2: 9(0,0)
  silkscreen extent -2,-1.55 1.55,1.6, body extent -1.5,-1.5 1.5,1.5, height 0.8
MOLEX_39-30-0040 [mm] "4.20mm (.165\") Pitch Mini-Fit Jr. Header, Dual Row, Right Angle with Snap-in Plastic Peg PCB Lock, 4 Circuits"
  round 2.5 hole 1.8: 1(-2.1,2.75) 2(2.1,2.75) 3(-2.1,-2.75) 4(2.1,-2.75)
  round 4 hole 3 unplated mask+1: 5(0,10.05)
  silkscreen extent -5.2,-1.24 4.8,16.63, body extent -5.2,-3.28 4.8,16.65, height 11.4
MOLEX_73171-3150 [mm]
  round 2 hole 1: 1(0,0)
  oval 3x2.5 hole 1.7: 2(-7.8,-3.8) 2(-7.8,3.8)
  silkscreen extent -11.6,-4.83 -3.6,4.83, body extent -25.4,-4.82 0.15,4.82, height 9.3
MTG300_600 [mm] "Plated Through Hole: Hole Dia.=3.0mm Pad Dia.=6.0mm"
  round 6 / inner round 4.5 / far side round 6 hole 3: MH(0,0)
PTH-M3.4x6.0_BTKO [mm]
  round 6 hole 3.4: 1(0,0)
  L4 keep-out region: -5,-3.05 -5,7.3 5,7.3 5,-3.05 1.173,-3.05 1.173,-3.056 2.504,-2.108 3.211,-0.635 3.118,0.997 2.247,2.38 0.817,3.169 -0.817,3.169 -2.247,2.38 -3.118,0.997 -3.211,-0.635 -2.504,-2.108 -1.173,-3.056 -1.173,-3.056 -1.173,-3.05
QFN50P700X800X80_HS-53M [mm]
  oval 1.05x0.25 smd: 1(-3.425,3.25) 2(-3.425,2.75) 3(-3.425,2.25) 4(-3.425,1.75) 5(-3.425,1.25) 6(-3.425,0.75) 7(-3.425,0.25) 8(-3.425,-0.25) 9(-3.425,-0.75) 10(-3.425,-1.25) 11(-3.425,-1.75) 12(-3.425,-2.25) 13(-3.425,-2.75) 14(-3.425,-3.25) 27(3.425,-3.25) 28(3.425,-2.75) 29(3.425,-2.25) 30(3.425,-1.75) 31(3.425,-1.25) 32(3.425,-0.75) 33(3.425,-0.25) 34(3.425,0.25) 35(3.425,0.75) 36(3.425,1.25) 37(3.425,1.75) 38(3.425,2.25) 39(3.425,2.75) 40(3.425,3.25)
  oval 0.25x1.05 smd: 15(-2.75,-3.925) 16(-2.25,-3.925) 17(-1.75,-3.925) 18(-1.25,-3.925) 19(-0.75,-3.925) 20(-0.25,-3.925) 21(0.25,-3.925) 22(0.75,-3.925) 23(1.25,-3.925) 24(1.75,-3.925) 25(2.25,-3.925) 26(2.75,-3.925) 41(2.75,3.925) 42(2.25,3.925) 43(1.75,3.925) 44(1.25,3.925) 45(0.75,3.925) 46(0.25,3.925) 47(-0.25,3.925) 48(-0.75,3.925) 49(-1.25,3.925) 50(-1.75,3.925) 51(-2.25,3.925) 52(-2.75,3.925)
  rect 5.41x6.4 smd: 53(0,0)
  silkscreen extent -4.47,-4.2 3.7,4.2, body extent -3.55,-4.05 3.55,4.05, height 0.8
RESC1005X40N [mm]
  rect 0.58x0.62 smd: 1(-0.47,0) 2(0.47,0)
  body extent -0.52,-0.27 0.53,0.28, height 0.4
RESC1608X55N [mm] "Chip Resistor, EIA 0603, Metric 1608, Body 1.6x0.8mm, IPC Medium Density"
  rect 0.9x1 smd: 1(-0.8,0) 2(0.8,0)
  body extent -0.87,-0.47 0.88,0.48, height 0.55
RESC2012X60N [mm] "Chip Resistor, EIA 0805, Metric 2012, Body 2.0x1.2mm, IPC Medium Density"
  rect 0.95x1.4 smd: 1(-1,0) 2(1,0)
  silkscreen extent 0,-0.55 0,0.55, body extent -1.1,-0.67 1.1,0.68, height 0.6
RESC2113X55N [mm] "Chip Resistor, EIA 0805, Metric 2113, Body 2.05x1.3mm, IPC Medium Density"
  rect 1x1.45 smd: 1(-0.95,0) 2(0.95,0)
  silkscreen extent 0,-0.55 0,0.55, body extent -1,-0.62 1,0.63, height 0.55
RESC6331X70N [mm] "Chip Resistor, EIA 2512, Metric 6331, 2-Leads, Body 6.3x3.1mm, IPC Medium Density"
  rect 1.05x3.3 smd: 1(-3.1,0) 2(3.1,0)
  silkscreen extent -2.2,-1.65 2.2,1.65, body extent -3.25,-1.65 3.25,1.65, height 0.7
SAMTEC_SO-1115-03-N [mm] "11.15mm Length, Precision Board Stacking Standoff Male/Female"
  round 6 / inner round 4.5 / far side round 6 hole 3.3: MH(0,0)
  silkscreen extent -3.35,-3.35 3.35,3.35, body extent -2.75,-2.38 2.75,2.38, height 11.15
SOD-523F [mm] "Small Outline Diode Flat Lead (SOD-523F), Body; 1.80mm L X 1mm W X 0.85mm H"
  rect 0.6x0.8 smd: 1(-0.85,0) 2(0.85,0)
  silkscreen extent -1.8,-0.5 0.2,0.5, body extent -0.91,-0.5 0.89,0.5, height 0.85
SODFL2512X100N [mm] "SODFL Diode; 1.70mm W X 1.25mm L X 1.00mm H body, IPC Medium Density"
  rect 0.84x0.46 smd: 1(-1.14,0) 2(1.14,0)
  silkscreen extent -1.47,-0.65 0.85,0.86, body extent -1.35,-0.65 1.35,0.65, height 1
SOIC127P600X175-8N [mm] "SOIC 8, Pitch 1.27mm - Body 4x5mm, IPC Medium Density"
  rect 1.55x0.6 smd: 1(-2.7,1.905) 2(-2.7,0.635) 3(-2.7,-0.635) 4(-2.7,-1.905) 5(2.7,-1.905) 6(2.7,-0.635) 7(2.7,0.635) 8(2.7,1.905)
  silkscreen extent -1.55,-2.5 1.55,2.5, body extent -3.1,-2.5 3.1,2.5, height 1.75
SOIC127P1030X265-16N [mm] "SOIC, 1.27mm Pitch; 16 Pin, 7.50mm W X 10.3mm L X 2.65mm H body, IPC Medium Density"
  rect 2x0.6 smd: 1(-4.65,4.445) 2(-4.65,3.175) 3(-4.65,1.905) 4(-4.65,0.635) 5(-4.65,-0.635) 6(-4.65,-1.905) 7(-4.65,-3.175) 8(-4.65,-4.445) 9(4.65,-4.445) 10(4.65,-3.175) 11(4.65,-1.905) 12(4.65,-0.635) 13(4.65,0.635) 14(4.65,1.905) 15(4.65,3.175) 16(4.65,4.445)
  silkscreen extent -5.52,-5.15 3.32,5.36, body extent -5.18,-5.25 5.18,5.25, height 1.68
SON50P160X65_HS-7N [mm] "SON, 6-Leads, Body 1,60x1,60mm, Pitch 0,50mm, Thermal Pad 1,18x0,28mm, IPC Medium Density"
  rect 0.63x0.3 smd: 1(-0.76,0.5) 2(-0.76,0) 3(-0.76,-0.5) 4(0.76,-0.5) 5(0.76,0) 6(0.76,0.5)
  rect 0.45x1.3 smd: 7(0,0)
  silkscreen extent -1.28,-0.98 0.85,1.02, body extent -0.85,-0.85 0.85,0.85, height 0.65
SON50P200X300X80-11N-R94X250 [mm] "SON, 10-Leads, Body 2x3mm, Pitch 0.5mm, Thermal Pad 0.94x2.5mm, IPC Medium Density"
  rect 0.7x0.3 smd: 1(-1.05,1) 2(-1.05,0.5) 3(-1.05,0) 4(-1.05,-0.5) 5(-1.05,-1) 6(1.05,-1) 7(1.05,-0.5) 8(1.05,0) 9(1.05,0.5) 10(1.05,1)
  rect 0.94x2.5 smd: 11(0,0)
  silkscreen extent -1.5,-1.55 1.05,1.6, body extent -1.05,-1.55 1.05,1.55, height 0.8
SOP50P310X90-8N [mm] "SOP, 0.50mm pitch; 8 pin, 2.30mm W X 2.00mm L X 0.90mm H body, PC Medium Density"
  rect 0.85x0.3 smd: 1(-1.55,0.75) 2(-1.55,0.25) 3(-1.55,-0.25) 4(-1.55,-0.75) 5(1.55,-0.75) 6(1.55,-0.25) 7(1.55,0.25) 8(1.55,0.75)
  silkscreen extent -1.83,-1 0.8,1.52, body extent -1.62,-1 1.62,1, height 0.9
SOP50P490X110-10N [mm] "MSOP, 10-Leads, Body 3.1x3.1mm (max), Pitch 0.50mm, IPC Medium Density"
  rect 1.5x0.3 smd: 1(-2.2,1) 2(-2.2,0.5) 3(-2.2,0) 4(-2.2,-0.5) 5(-2.2,-1) 6(2.2,-1) 7(2.2,-0.5) 8(2.2,0) 9(2.2,0.5) 10(2.2,1)
  silkscreen extent -2.82,-1.5 1.12,1.77, body extent -2.45,-1.55 2.45,1.55, height 1.1
SOP65P490X110-8N [mm]
  rect 1.5x0.45 smd: 1(-2.2,0.975) 2(-2.2,0.325) 3(-2.2,-0.325) 4(-2.2,-0.975) 5(2.2,-0.975) 6(2.2,-0.325) 7(2.2,0.325) 8(2.2,0.975)
  silkscreen extent -2.82,-1.5 1.12,1.82, body extent -2.45,-1.55 2.45,1.55, height 1.1
SOP65P640X120-16N [mm] "SOP, 0.65mm pitch; 16 pin, 4.40mm W X 5.00mm L X 1.20mm H body IPC Medium Density"
  rect 1.45x0.45 smd: 1(-2.95,2.275) 2(-2.95,1.625) 3(-2.95,0.975) 4(-2.95,0.325) 5(-2.95,-0.325) 6(-2.95,-0.975) 7(-2.95,-1.625) 8(-2.95,-2.275) 9(2.95,-2.275) 10(2.95,-1.625) 11(2.95,-0.975) 12(2.95,-0.325) 13(2.95,0.325) 14(2.95,0.975) 15(2.95,1.625) 16(2.95,2.275)
  silkscreen extent -3.07,-2.55 1.85,3.17, body extent -3.12,-2.55 3.12,2.55, height 1.2
SOT95P240X110-3N [mm] "SOT23 3-Leads, Pitch 0.95mm, Body 1.3x2.9mm, IPC Medium Density"
  rect 1.05x0.65 smd: 1(-1.15,0.95) 2(-1.15,-0.95) 3(1.15,0)
  silkscreen extent -1.52,-1.45 0.3,1.92, body extent -1.25,-1.5 1.25,1.5, height 1.1
SOT95P280X100-5N [mm] "SOT23, 0.95mm pitch; 5 pin, 1.625mm W X 2.9mm L, IPC Medium Density"
  rect 1.1x0.55 smd: 1(-1.35,0.95) 2(-1.35,0) 3(-1.35,-0.95) 4(1.35,-0.95) 5(1.35,0.95)
  silkscreen extent -1.78,-1.45 0.48,1.87, body extent -1.4,-1.5 1.4,1.5, height 1
SOT95P280X145-5N [mm] "SOT, 0.95mm pitch; 5 pin, 1.60mm W X 2.90mm L X 1.45mm H body, IPC Medium Density"
  rect 1.1x0.6 smd: 1(-1.3,0.95) 2(-1.3,0) 3(-1.3,-0.95) 4(1.3,-0.95) 5(1.3,0.95)
  silkscreen extent -1.72,-1.45 0.43,1.87, body extent -1.4,-1.5 1.4,1.5, height 1.45
SOT95P280X145-6N [mm] "SOT23, 6-Leads, Body 1.6x3.0mm, Pitch 0.95mm, IPC Medium Density"
  rect 1.05x0.6 smd: 1(-1.35,0.95) 2(-1.35,0) 3(-1.35,-0.95) 4(1.35,-0.95) 5(1.35,0) 6(1.35,0.95)
  silkscreen extent -1.77,-1.55 0.45,1.92, body extent -1.4,-1.5 1.4,1.5, height 1.45
SW_CTS_204-121ST [mm] "Body 7.26 x 9.78mm SPDT DIP Switch, 204 Series"
  rect 2.44x1.13 smd: 1(-4.3,1.27) 2(-4.3,-1.27) 3(4.3,-1.27) 4(4.3,1.27)
  silkscreen extent -6.25,-3.63 4.89,3.63, body extent -5.2,-3.63 5.2,3.63, height 9.76
TPS127 [mm] "1.27 x  1.27mm SMD Test Point Area"
  rect 1.27x1.27 smd paste-1.27: 1(0,0)
  silkscreen extent -0.94,-0.94 0.94,0.94

## Part data
C1A C1B C1C C1D C1E C1F C1G C1H C5A C5B C5C C5D C5E C5F C5G C5H T_C12: library part CC0603_18PF_50V_5%_NP0, "Non-polarised capacitor", Case=0603, Manufacturer=GENERIC, Manufacturer1 ComponentHeight=0.87mm, Manufacturer1 Example=PHYCOMP, Manufacturer1 Part Number=223886715189, Tolerance=±5%, Voltage=50V, Author="CERN DEM JLC", Component Type=Standard, CreateDate=03.12.2007, HelpURL=\\cern.ch\dfs\Applications\Altium\Datasheets\CC0603_NP0_PHYCOMP.pdf, LatestRevisionDate=03.12.2007, Manufacturer Part Number=CC0603_18PF_50V_5%_NP0, Mounted=Yes, Part Description="SMD Multilayer Chip Ceramic Capacitor", Part Number=CC0603_18PF_50V_5%_NP0, Pin Count=2, Sense=No, SMD=Yes, Socket=No, Status=Preferred, TC=C0G/NP0
C2A C2B C2C C2D C2E C2F C2G C2H: library part CC0805_82PF_100V_1%_NP0_AVX_08051A820FAT2A, "Non-polarised capacitor", Case=0805, Manufacturer=AVX, Manufacturer Part Number=08051A820FAT2A, Tolerance=±1%, Voltage=100V, Author="CERN DEM WB", ComponentHeight=0.9mm, Component Type=Standard, CreateDate=26.07.2016, HelpURL=\\cern.ch\dfs\Applications\Altium\Datasheets\CC0805_C0G_AVX.pdf, LatestRevisionDate=26.07.2016, Mounted=Yes, Part Description="SMD Multilayer Chip Ceramic Capacitor", Part Number=CC0805_82PF_100V_1%_NP0_AVX_08051A820FAT2A, Pin Count=2, Sense=No, SMD=Yes, Socket=No, Status="Not Recommended", TC=NP0
C3A C3B C3C C3D C3E C3F C3G C3H C12A C12B C12C C12D C12E C12F C12G C12H C103 C106: library part CC0805_47NF_25V_5%_C0G, "Non-polarised capacitor", Case=0805, Manufacturer=GENERIC, Manufacturer1 ComponentHeight=1.4mm, Manufacturer1 Example=KEMET, Manufacturer1 Part Number=C0805C473J3GACTU, Tolerance=±5%, Voltage=25V, Author="CERN DEM JLC", Component Type=Standard, CreateDate=18.01.2011, HelpURL="\\cern.ch\dfs\Applications\Altium\Datasheets\CC0805_C0G_KEMET_(Commercial Grade).pdf", LatestRevisionDate=18.01.2011, Manufacturer Part Number=CC0805_47NF_25V_5%_C0G, Mounted=Yes, Part Description="SMD Multilayer Chip Ceramic Capacitor", Part Number=CC0805_47NF_25V_5%_C0G, Pin Count=2, Sense=No, SMD=Yes, Socket=No, Status=None, TC=C0G/NP0
C4A C4B C4C C4D C4E C4F C4G C4H C6A C6B C6C C6D C6E C6F C6G C6H C7A C7B C7C C7D C7E C7F C7G C7H: library part CC0805_2.2NF_25V_1%_C0G, "Non-polarised capacitor", Case=0805, Manufacturer=GENERIC, Manufacturer1 ComponentHeight=0.88mm, Manufacturer1 Example=KEMET, Manufacturer1 Part Number=C0805C222F3GACTU, Tolerance=±1%, Voltage=25V, Author="CERN DEM JLC", Component Type=Standard, CreateDate=11.03.2015, HelpURL="\\cern.ch\dfs\Applications\Altium\Datasheets\CC0805_C0G_KEMET_(Commercial Grade).pdf", LatestRevisionDate=11.03.2015, Manufacturer Part Number=CC0805_2.2NF_25V_1%_C0G, Mounted=Yes, Part Description="SMD Multilayer Chip Ceramic Capacitor", Part Number=CC0805_2.2NF_25V_1%_C0G, Pin Count=2, Sense=No, SMD=Yes, Socket=No, Status=None, TC=C0G/NP0
C8A C8B C8C C8D C8E C8F C8G C8H C11A C11B C11C C11D C11E C11F C11G C11H C38 C44 C47 C50 C52 C60 C62 C63 C67 C77 C80 C84: library part CTE3216-18_10UF_16V_20%_AVX_TCJ, "Polarised capacitor", Case=A, Manufacturer=AVX, Manufacturer Part Number=TCJA106M016R0200, Tolerance=±20%, Voltage=16V, Author="CERN DEM JLC", ComponentHeight=1.8mm, Component Type=Standard, CreateDate=29.03.2012, HelpURL=\\cern.ch\dfs\Applications\Altium\Datasheets\CTE_AVX_TCJ.pdf, LatestRevisionDate=29.03.2012, Mounted=Yes, Part Description="ESR 0R200 Tantalum Solid Electrolytic Chip Capacitor with Conductive Polymer Electrode", Part Number=CTE3216-18_10UF_16V_20%_AVX_TCJ, Pin Count=2, Sense=No, SMD=Yes, Socket=No, Status=Preferred
C9A C9B C9C C9D C9E C9F C9G C9H C10A C10B C10C C10D C10E C10F C10G C10H C13A C13B C13C C13D C13E C13F C13G C13H C14A C14B C14C C14D C14E C14F C14G C14H C15 C16 C17 C18 C19 C20 C21 C22 C23 C24 C25 C27 C28 C29 C30 C32 C33 C39 C45 C64 C69 C73 C76 C78 C83 C85 C87 C88 C89 C90 C92 C93 C104 C105 T_C3 T_C4 T_C5 T_C6 T_C8 T_C14 T_C15 T_C20 T_C21 T_C22 T_C23 T_C24 T_C25: library part CC0402_100NF_50V_10%_X7R, "Non-polarised capacitor", Case=0402, Manufacturer=GENERIC, Manufacturer1 ComponentHeight=0.55mm, Manufacturer1 Example=MURATA, Manufacturer1 Part Number=GRM155R71H104KE14D, Tolerance=±10%, Voltage=50V, Author="CERN DEM MR", Component Type=Standard, CreateDate=30.06.2017, HelpURL=\\cern.ch\dfs\Applications\Altium\Datasheets\CC0402_MURATA_GRM155R71H104KE14D.pdf, LatestRevisionDate=30.06.2017, Manufacturer Part Number=CC0402_100NF_50V_10%_X7R, Mounted=Yes, Part Description="SMD Multilayer Chip Ceramic Capacitor", Part Number=CC0402_100NF_50V_10%_X7R, Pin Count=2, Sense=No, SMD=Yes, Socket=No, Status=None, TC=X7R
C26 C37 C41 C43 C51 C61 C65 C66 C71 C72 C101 C102 T_C1: library part CC0603_1UF_25V_10%_X7R, "Non-polarised capacitor", Case=0603, Manufacturer=GENERIC, Manufacturer1 ComponentHeight=0.9mm, Manufacturer1 Example=MURATA, Manufacturer1 Part Number=GRM188R71E105KA12D, Tolerance=±10%, Voltage=25V, Author="CERN DEM JLC", Component Type=Standard, CreateDate=18.01.2011, HelpURL=\\cern.ch\dfs\Applications\Altium\Datasheets\CC0603_X7R_MURATA.pdf, LatestRevisionDate=18.01.2011, Manufacturer Part Number=CC0603_1UF_25V_10%_X7R, Mounted=Yes, Part Description="SMD Multilayer Chip Ceramic Capacitor", Part Number=CC0603_1UF_25V_10%_X7R, Pin Count=2, Sense=No, SMD=Yes, Socket=No, Status=None, TC=X7R
C40 C42 C46 C75 C82 T_C13 T_C16 T_C17 T_C18 T_C19: library part CC0402_10NF_50V_5%_X7R, "Non-polarised capacitor", Case=0402, Manufacturer=GENERIC, Manufacturer1 ComponentHeight=0.55mm, Manufacturer1 Example=KEMET, Manufacturer1 Part Number=C0402C103J5RAC, Tolerance=±5%, Voltage=50V, Author="CERN DEM BC", Component Type=Standard, CreateDate=15.07.2020, HelpURL=\\cern.ch\dfs\Applications\Altium\Datasheets\CC0402_X7R_KEMET.pdf, LatestRevisionDate=15.07.2020, Manufacturer Part Number=CC0402_10NF_50V_5%_X7R, Mounted=Yes, Part Description="SMD Multilayer Chip Ceramic Capacitor", Part Number=CC0402_10NF_50V_5%_X7R, Pin Count=2, Sense=No, SMD=Yes, Socket=No, Status=Preferred, TC=X7R
C48 C49 C53 C54 C55 C56 C57 C58 C59 C68 C70 C74 C79 C81 C86: library part CC0805_22UF_16V_10%_X5R, "Non-polarised capacitor", Case=0805, Manufacturer=GENERIC, Manufacturer1 ComponentHeight=1.35mm, Manufacturer1 Example=TDK, Manufacturer1 Part Number=C2012X5R1C226KT, Tolerance=±10%, Voltage=16V, Author="CERN DEM JLC", Component Type=Standard, CreateDate=25.10.2012, HelpURL=\\cern.ch\dfs\Applications\Altium\Datasheets\CC0805_X5R_TDK_C.pdf, LatestRevisionDate=25.10.2012, Manufacturer Part Number=CC0805_22UF_16V_10%_X5R, Mounted=Yes, Part Description="SMD Multilayer Chip Ceramic Capacitor", Part Number=CC0805_22UF_16V_10%_X5R, Pin Count=2, Sense=No, SMD=Yes, Socket=No, Status=Preferred, TC=X5R
C91 C94 C95 C96 C97 C98 C99 T_C9 T_C10 T_C11: library part CC0805_10UF_25V_10%_X5R, "Non-polarised capacitor", Case=0805, Manufacturer=GENERIC, Manufacturer1 ComponentHeight=0.95mm, Manufacturer1 Example=MURATA, Manufacturer1 Part Number=GRM219R61E106KA12D, Tolerance=±10%, Voltage=25V, Author="CERN DEM JLC", Component Type=Standard, CreateDate=25.10.2012, HelpURL=\\cern.ch\dfs\Applications\Altium\Datasheets\CC0805_X5R_MURATA_GRM.pdf, LatestRevisionDate=06.09.2016, Manufacturer Part Number=CC0805_10UF_25V_10%_X5R, Mounted=Yes, Part Description="SMD Multilayer Chip Ceramic Capacitor", Part Number=CC0805_10UF_25V_10%_X5R, Pin Count=2, Sense=No, SMD=Yes, Socket=No, Status=Preferred, TC=X5R
C100: library part CC0603_2.2UF_16V_10%_X5R, "Non-polarised capacitor", Case=0603, Manufacturer=GENERIC, Manufacturer1 ComponentHeight=0.9mm, Manufacturer1 Example=YAGEO, Manufacturer1 Part Number=CC0603KRX5R7BB225, Tolerance=±10%, Voltage=16V, Author="CERN DEM JLC", Component Type=Standard, CreateDate=28.04.2011, HelpURL=\\cern.ch\dfs\Applications\Altium\Datasheets\CC0805_X5R_PHYCOMP_HC.pdf, LatestRevisionDate=28.04.2011, Manufacturer Part Number=CC0603_2.2UF_16V_10%_X5R, Mounted=Yes, Part Description="SMD Multilayer Chip Ceramic Capacitor", Part Number=CC0603_2.2UF_16V_10%_X5R, Pin Count=2, Sense=No, SMD=Yes, Socket=No, Status=Preferred, TC=X5R
CLIP1 CLIP2 CLIP3 CLIP4 CLIP5 CLIP6 CLIP7 CLIP8 CLIP9 CLIP10 CLIP11 CLIP12 CLIP13 CLIP14 CLIP15 CLIP16 CLIP17 CLIP18: library part SHIELD_CLIP, "Surface Mount Clip for PCB Screening Covers", Manufacturer=HARWIN, Author="CERN DEM JLC", ComponentHeight=3.5mm, Component Type=Standard, CreateDate=2013-06-25, HelpURL=\\cern.ch\dfs\Applications\Altium\Datasheets\CLIP_HOLLAND-SHIELDING_LC.pdf, LatestRevisionDate=2013-06-25, Manufacturer Part Number=S1411-46R, Mounted=Yes, PackageDescription="Surface Mount Clip for PCB Screening Covers, 1500 Serie", Part Description="Surface Mount Clip for PCB Screening Covers, 1500 Serie", Part Number=S1411-46R, Pin Count=1, PressFit=No, SMD=Yes, Socket=No, Status=None, Table="Metal Screening Box"
D1A D1B D1C D1D D1E D1F D1G D1H D2A D2B D2C D2D D2E D2F D2G D2H: "Serial Diode", Case=SOT23-3, Manufacturer="NXP SEMICONDUCTORS", Power=250mW, Voltage=75V, Author="CERN DEM JMW", Bonding=No, ComponentHeight=1.1mm, Component Type=Standard, CreateDate=2008-11-21, Device=BAV199, HelpURL=\\cern.ch\dfs\Applications\Altium\Datasheets\BAV199.pdf, LatestRevisionDate=2008-11-21, Manufacturer Part Number=BAV199, Mounted=Yes, PackageDescription="SOT23 3-Leads, Pitch 0.95mm - Body 1.4x3mm, IPC Medium Density", Part Description="Low-Leakage Double Diode", Part Number=BAV199, Pin Count=3, PressFit=No, Sense=No, SMD=Yes, Socket=No
D5 D6 T_D5: "Zener Diode", Case=DO-214AA, Manufacturer="FAIRCHILD SEMICONDUCTOR", Power=600W, Voltage=12V, Author="CERN DEM JLC", Bonding=No, ComponentHeight=2.65mm, Component Type=Standard, CreateDate=10.04.2013, Device=SMBJ12A, HelpURL=\\cern.ch\dfs\Applications\Altium\Datasheets\SMBJ.pdf, LatestRevisionDate=10.04.2013, Manufacturer Part Number=SMBJ12A, Mounted=Yes, PackageDescription="DO-214-AA/SMB Diode, Molded Body; 5.34mm L X 3.625mm W X 2.65mm H, IPC Medium Density", Part Description="Uni-Directional Transient Voltage Suppressor Diode", Part Number=SMBJ12A, Pin Count=2, PressFit=No, Sense=No, SMD=Yes, Socket=No
D7 D8 D9 D10: "Diode", Case=SOD-323F, Manufacturer="FAIRCHILD SEMICONDUCTOR", Power=150mA, Voltage=75V, Author="CERN DEM JLC", Bonding=No, ComponentHeight=1mm, Component Type=Standard, CreateDate=12.05.2011, Device=1N4148WS, HelpURL=\\cern.ch\dfs\Applications\Altium\Datasheets\1N4148WS.pdf, LatestRevisionDate=12.05.2011, Manufacturer Part Number=1N4148WS, Mounted=Yes, PackageDescription="SODFL Diode; 1.70mm W X 1.25mm L X 1.00mm H body, IPC Medium Density", Part Description="Small Signal Diodes", Part Number=1N4148WS, Pin Count=2, PressFit=No, Sense=No, SMD=Yes, Socket=No
FTG1 FTG4: library part FIDUCIAL_TARGET_C100-200, "Fiducial Target", Author="CERN DEM JLC", Component Type="Standard (No BOM)", ComponentHeight=0mm, CreateDate=09.02.2010, Family=Fiducial, HelpURL=Undefined, LatestRevisionDate=04.04.2012, Mounted=No, PackageDescription="Round Fiducial Target, Top Layer, 1.0mm, Top Solder 2.0mm, Keepout =2.0mm", Part Description="Round Fiducial Target, Top Layer, 1.0mm, Top Solder 2.0mm, Keepout =2.0mm", Part Number=FIDUCIAL_TARGET_C100-200, Pin Count=1, Sense=No, SMD=Yes, Socket=No, Status=None
FTG2 FTG3 FTG5 FTG6: library part FIDUCIAL_TARGET_S100-200, "Fiducial Target", Author="CERN DEM JLC", Component Type="Standard (No BOM)", ComponentHeight=0mm, CreateDate=09.02.2010, Family=Fiducial, HelpURL=Undefined, LatestRevisionDate=04.04.2012, Mounted=No, PackageDescription="Square Fiducial Target, Top Layer, 1.0mm, Top Solder 2.0mm, Keepout =2.0mm", Part Description="Square Fiducial Target, Top Layer, 1.0mm, Top Solder 2.0mm, Keepout =2.0mm", Part Number=FIDUCIAL_TARGET_S100-200, Pin Count=1, Sense=No, SMD=Yes, Socket=No, Status=None
IC1A IC1B IC1C IC1D IC1E IC1F IC1G IC1H IC35: library part OA_OPA2197IDGKR, "36-V, Precision, Rail-to-Rail Input Output, Low Offset Voltage Op Amp 8-VSSOP", Case=MSOP8, Manufacturer="TEXAS INSTRUMENTS", Author=GK, Bonding=No, ComponentHeight=1.1mm, Component Type=Standard, CreateDate=20.04.2017, Device=OPA2197IDGKR, HelpURL=\\cern.ch\dfs\Applications\Altium\Datasheets\OPA2140AIDGK.pdf, LatestRevisionDate=20.04.2017, Manufacturer Part Number=OPA2197IDGKR, Mounted=Yes, PackageDescription="SOP, 0.65mm pitch; 8 pin, 3.00mm W X 3.00mm L X 1.10mm H body, IPC Medium Density", Part Description="High-Precision, Low-Noise, Rail-to-Rail Output,10-MHz Op Amp", Part Number=OPA2197IDGKR, Pin Count=8, PressFit=No, Sense=No, SMD=Yes, Socket=No
IC2A IC2B IC2C IC2D IC2E IC2F IC2G IC2H: "10MHz, 20V/us, G= 1, 10, 100, 1000 iCMOS Programmable Gain Instrumentation Amplifier", Case=MSOP10, Manufacturer="ANALOG DEVICES", Author="CERN DEM JLC", Bonding=No, ComponentHeight=1.1mm, Component Type=Standard, CreateDate=2013-10-02, Device=AD8253ARMZ, HelpURL=\\cern.ch\dfs\Applications\Altium\Datasheets\AD8253ARMZ.pdf, LatestRevisionDate=2013-10-02, Manufacturer Part Number=AD8253ARMZ, Mounted=Yes, PackageDescription="MSOP, 10-Leads, Body 3.1x3.1mm (max), Pitch 0.50mm, IPC Medium Density", Part Description="10MHz, 20V/us, G= 1, 10, 100, 1000 iCMOS Programmable Gain Instrumentation Amplifier", Part Number=AD8253ARMZ, Pin Count=8, PressFit=No, Sense=No, SMD=Yes, Socket=No
IC3: "Remote 8-bit I/O Expander For I2C Bus", Case=SOIC16W, Manufacturer="TEXAS INSTRUMENTS", Author="CERN DEM JLC", Bonding=No, ComponentHeight=2.65mm, Component Type=Standard, CreateDate=01.11.2012, Device=PCF8574ADW, HelpURL=\\cern.ch\dfs\Applications\Altium\Datasheets\PCF8574ADW.pdf, LatestRevisionDate=01.11.2012, Manufacturer Part Number=PCF8574ADW, Mounted=Yes, PackageDescription="SOIC 16, Pitch 1.27mm - Body 7.5x10.3mm, IPC Medium Density", Part Description="Remote 8-bit I/O Expander For I2C Bus", Part Number=PCF8574ADW, Pin Count=16, PressFit=No, Sense=No, SMD=Yes, Socket=No